# Altium PCB sana_rafia.PcbDoc
Units mm, origin at the board's own origin, x right, y up, seen from the top; angles counter-clockwise.
Board outline 103.5 x 63.75 mm, 2 copper layers (Top Layer, Bottom Layer); 28 components, 23 nets, 114 pads, 21 vias.
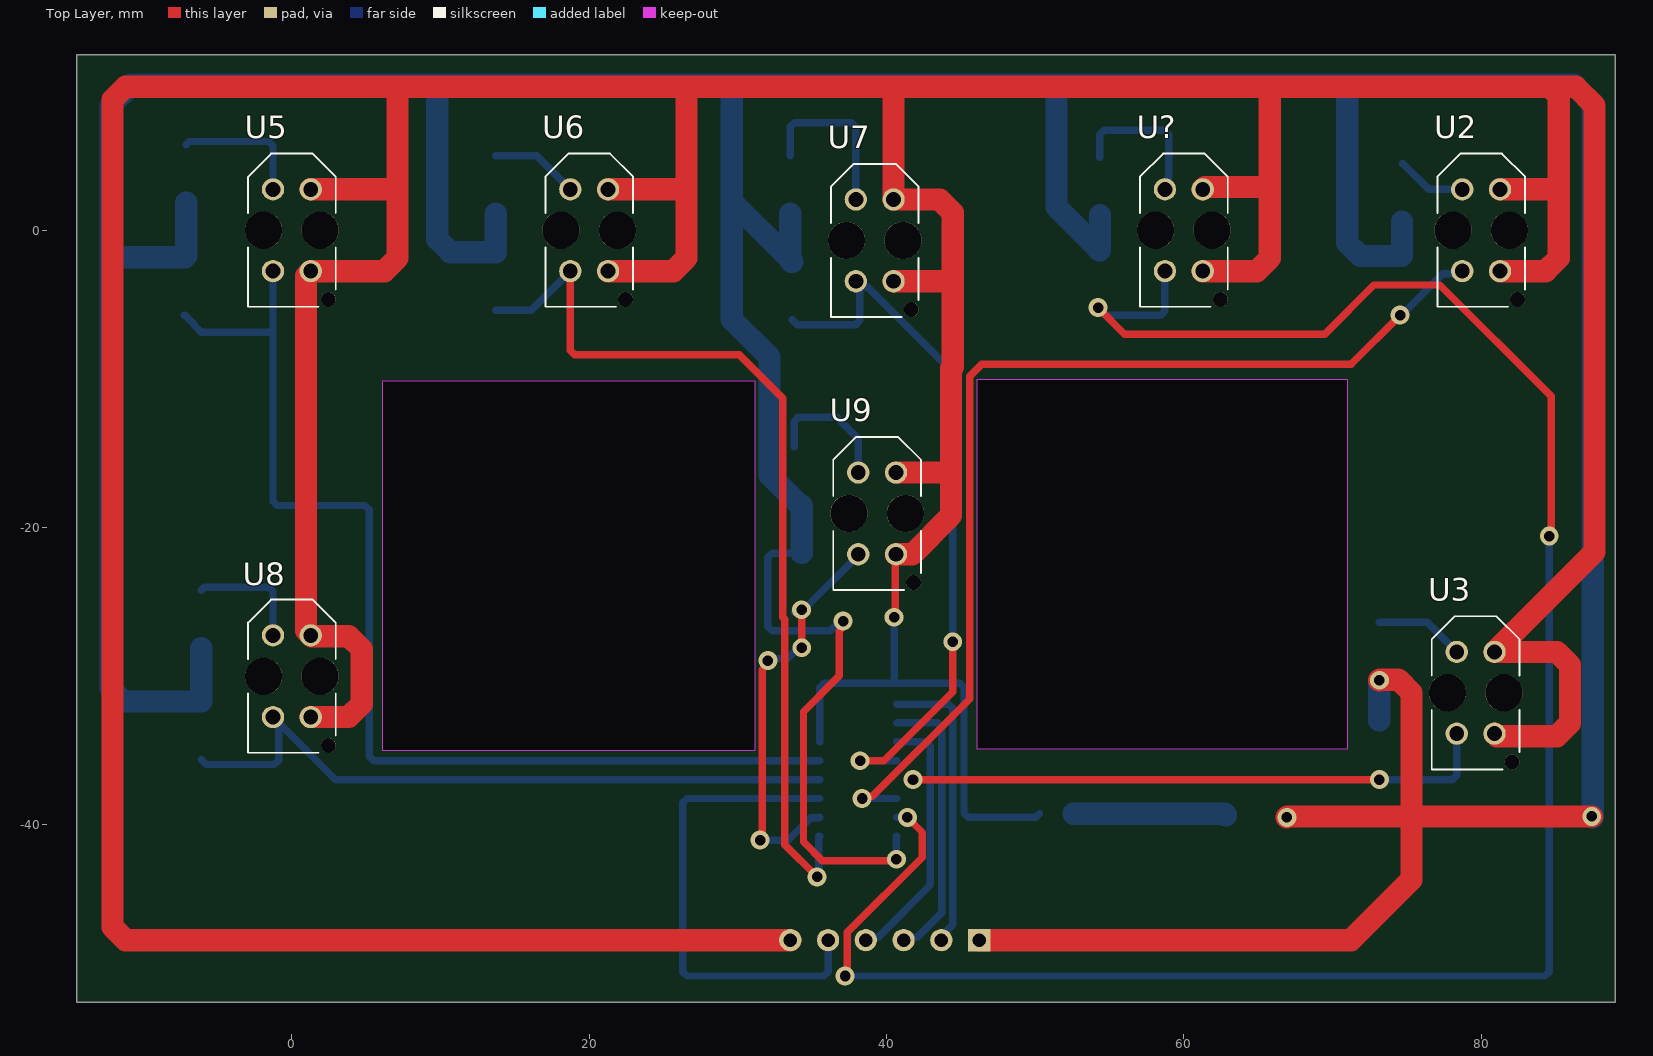
[diagram p0: Top Layer view]
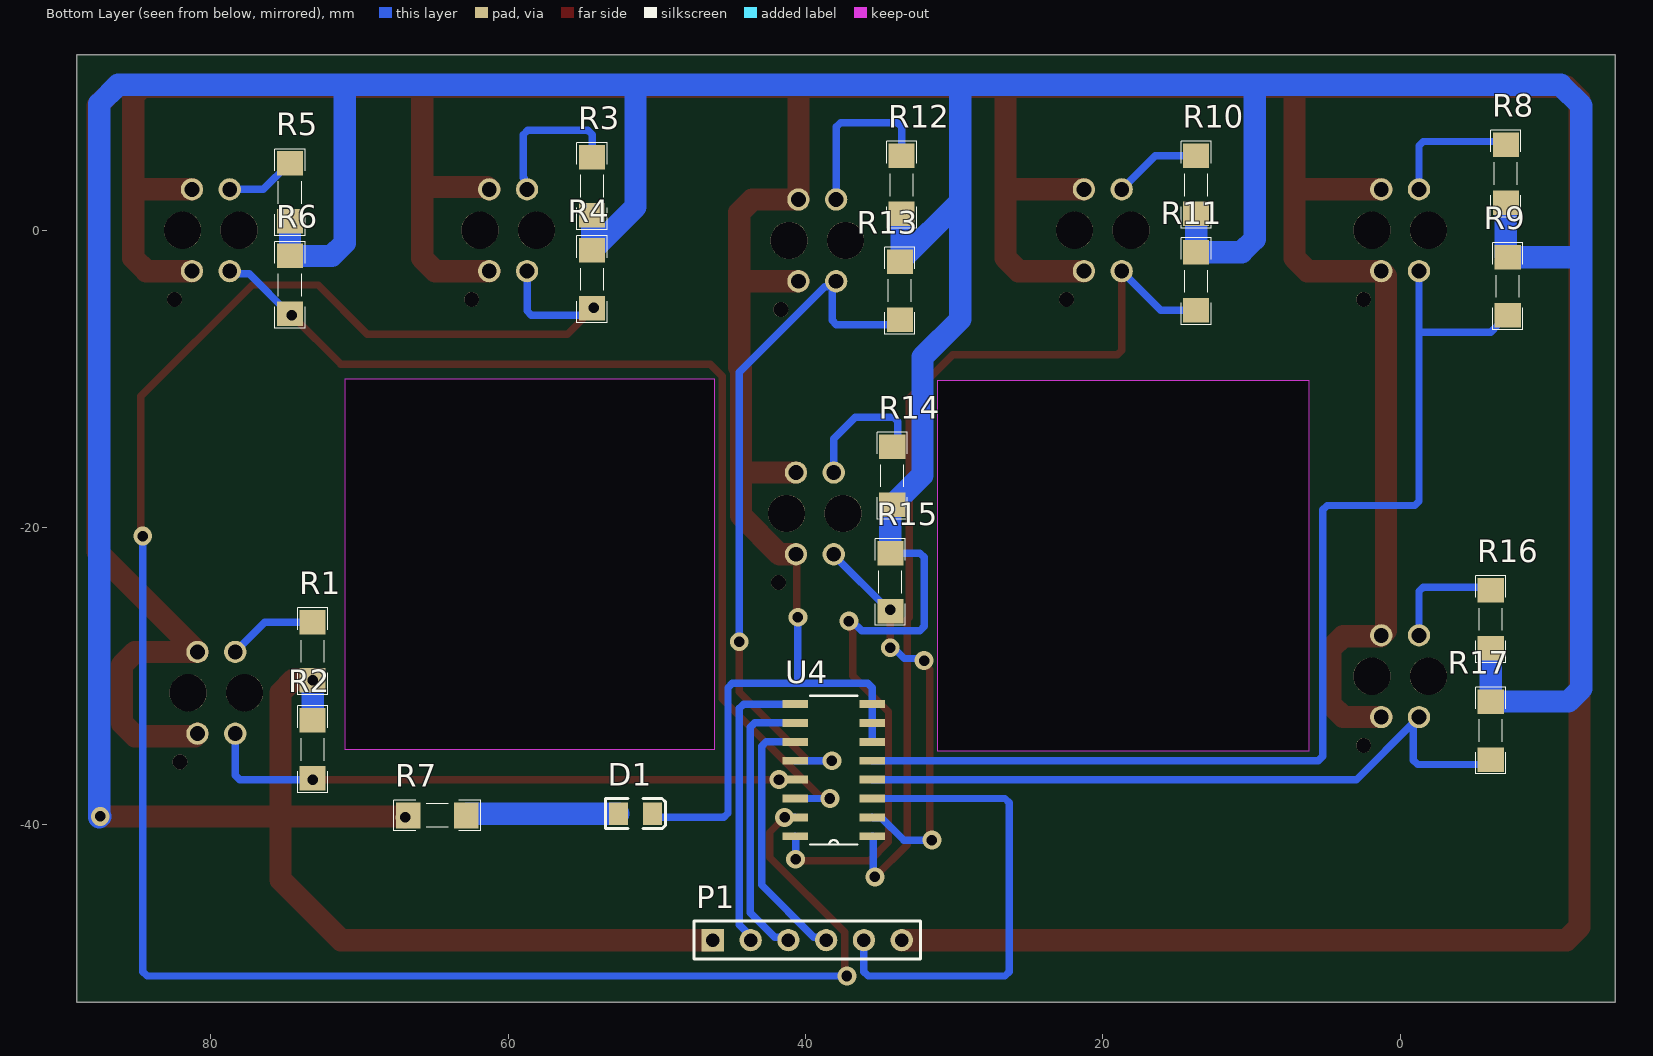
[diagram p1: Bottom Layer view, seen from below]
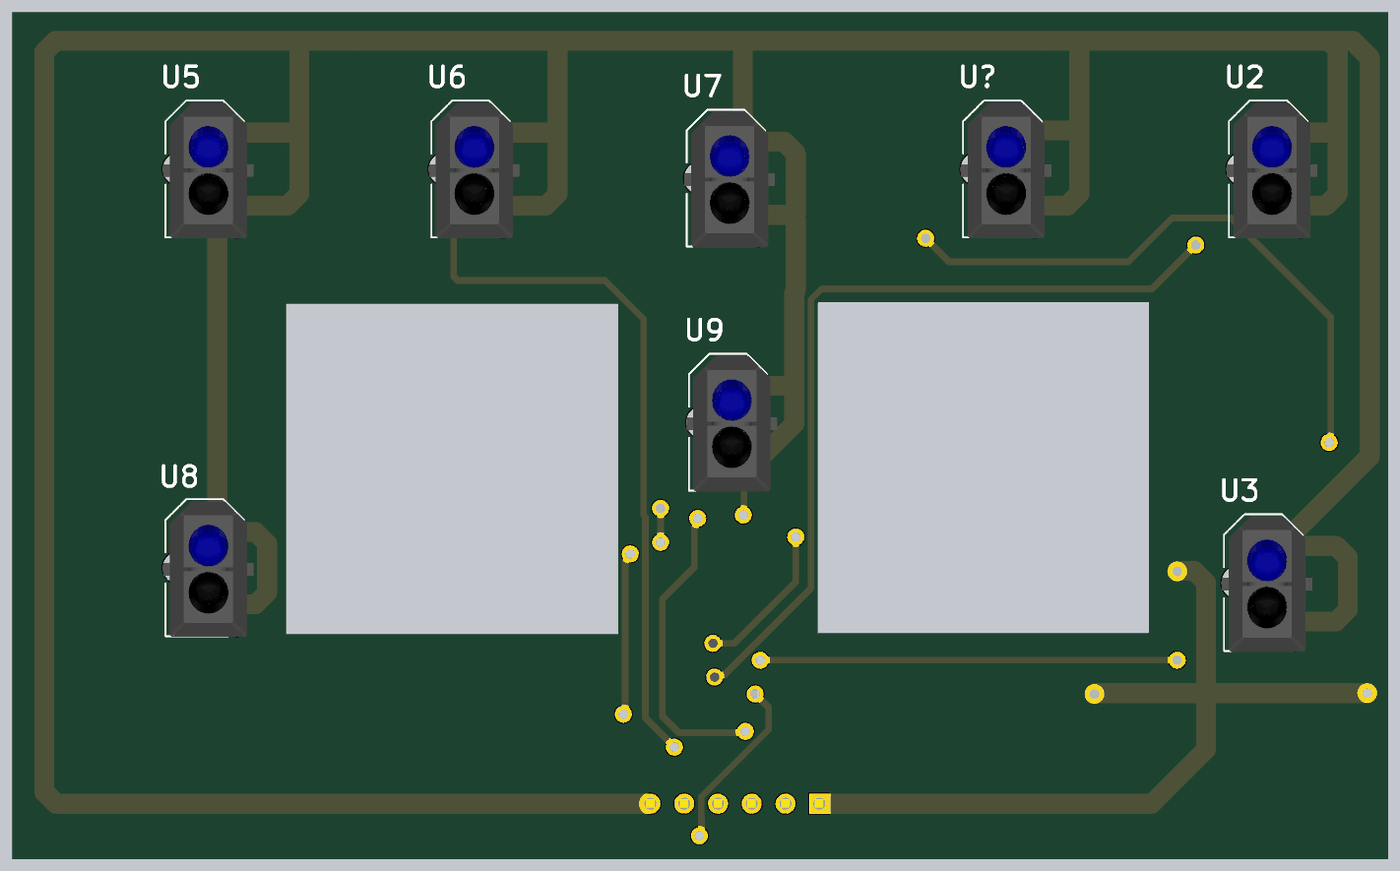
[diagram p2: 3D render of the assembled board from above, using the file's embedded part models]
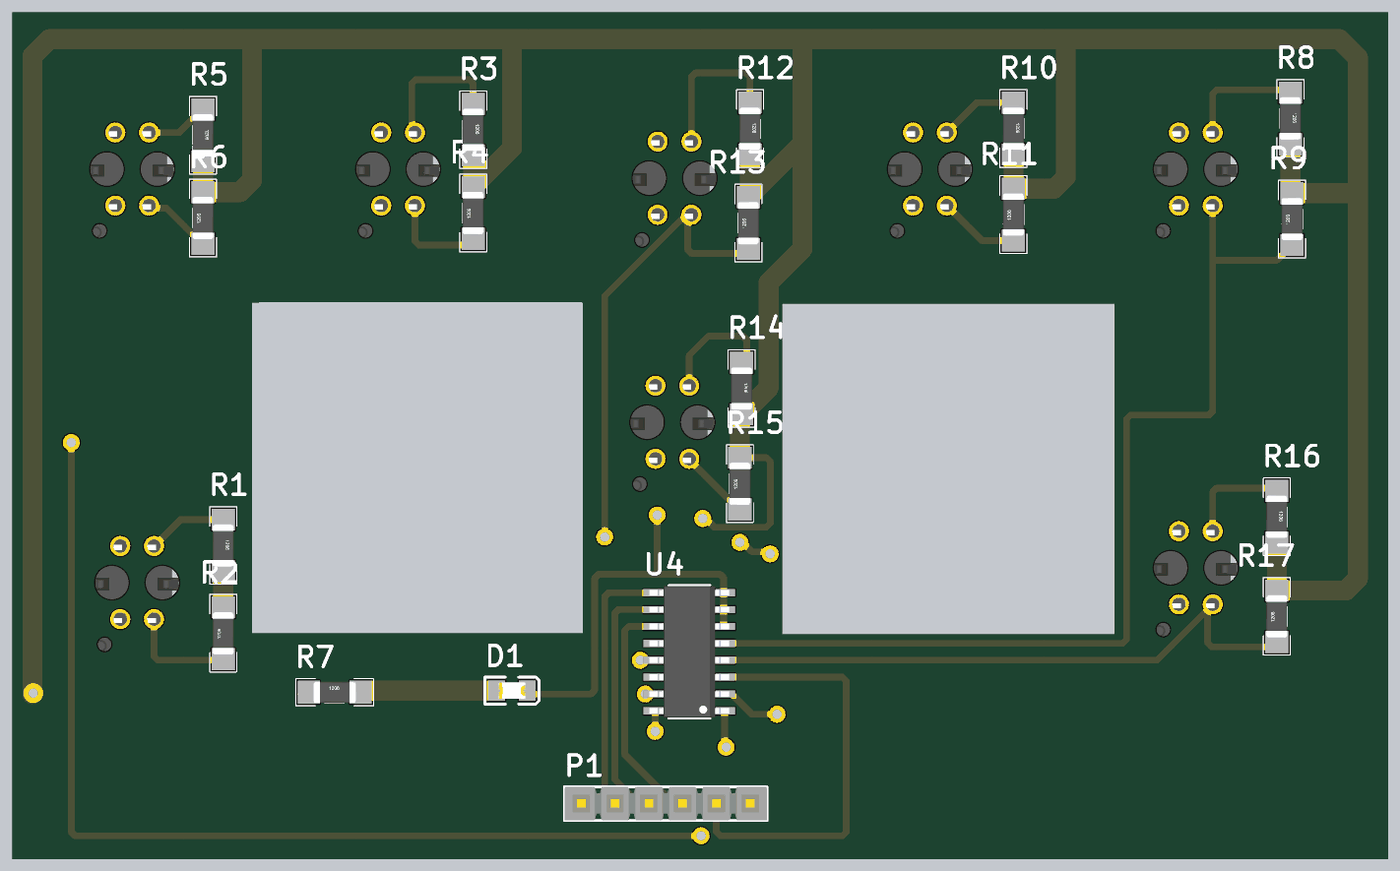
[diagram p3: 3D render of the assembled board from below, using the file's embedded part models]

## Layer stack, top to bottom
Top Solder: solder mask 0.0102, Solder Resist, Dk 3.5
Top Layer: signal copper 0.0356
Dielectric 1: dielectric 0.32, FR-4, Dk 4.8
Bottom Layer: signal copper 0.0356
Bottom Solder: solder mask 0.0102, Solder Resist, Dk 3.5

## Board outline
-14.478,-51.943 -14.478,11.811 89.027,11.811 89.027,-51.943
cut-out: 46.101,-10.033 70.993,-10.033 70.993,-34.925 46.101,-34.925
cut-out: 31.127,-10.127 31.127,-35 6.127,-35 6.127,-10.127

## Design rules (kind name [scope] priority, off if disabled: settings)
Clearance [All] p1: gap=0.254 ignorepadtopadclearanceinfootprint=FALSE except(0: Arc-Hole Track-Hole SMDPad-Hole THPad-Hole Via-Hole Fill-Hole Poly-Hole Region-Hole Text-Hole)
PolygonConnect [All] p1: connectstyle=Relief reliefconductorwidth=0.254 reliefentries=4 polygonreliefangle="90 Angle" airgapwidth=0.254
RoutingVias [All] p1: holewidth=0.711 width=1.27 viastyle="Through Hole" minholewidth=0.711 minwidth=1.27 maxholewidth=0.711 maxwidth=1.27
SolderMaskExpansion [All] p1: expansion=0.102 istentingtop=FALSE
Width [All] p1: maxlimit=1.5 minlimit=0.5 preferedwidth=1 minimp=50.000000 maximp=50.000000 favimp=50.000000
30 further rules are at their usual default settings.

## Components (designator, comment, footprint, x,y, rotation, side; value= is the part's Value field where it differs from the comment)
D1 "LED-SMD(0805)" "0805 LED" 51.435,-39.243 r180 bottom
P1 "Header 6" HDR1X6 46.228,-47.752 r180 bottom
R1 "1K" RESC4817X04N 73.152,-28.321 r270 bottom
R2 "1K" RESC4817X04N 73.152,-34.925 r90 bottom
R3 "1K" RESC4817X04N 54.356,2.966 r270 bottom
R4 "1K" RESC4817X04N 54.356,-3.302 r90 bottom
R5 "1K" RESC4817X04N 74.676,2.54 r270 bottom
R6 "1K" RESC4817X04N 74.676,-3.683 r90 bottom
R7 "1K" RESC4817X04N 64.77,-39.37 r180 bottom
R8 "1K" RESC4817X04N -7.112,3.81 r270 bottom
R9 "1K" RESC4817X04N -7.239,-3.765 r90 bottom
R10 "1K" RESC4817X04N 13.716,3.048 r270 bottom
R11 "1K" RESC4817X04N 13.716,-3.429 r90 bottom
R12 "1K" RESC4817X04N 33.528,3.048 r270 bottom
R13 "1K" RESC4817X04N 33.655,-4.064 r90 bottom
R14 "1K" RESC4817X04N 34.163,-16.51 r270 bottom
R15 "1K" RESC4817X04N 34.29,-23.667 r90 bottom
R16 "1K" RESC4817X04N -6.096,-26.162 r270 bottom
R17 "1K" RESC4817X04N -6.096,-33.655 r90 bottom
U2 "TCRT5000" OPTO_TCRT5000 80,0 r90 top
U3 "TCRT5000" OPTO_TCRT5000 79.629,-31.115 r90 top
U4 "74HC4051D" SOIC127P600X175-16N 38.1,-36.322 r0 bottom
U5 "TCRT5000" OPTO_TCRT5000 0,0 r90 top
U6 "TCRT5000" OPTO_TCRT5000 20,0 r90 top
U7 "TCRT5000" OPTO_TCRT5000 39.206,-0.684 r90 top
U8 "TCRT5000" OPTO_TCRT5000 0,-30 r90 top
U9 "TCRT5000" OPTO_TCRT5000 39.37,-19.05 r90 top
U? "TCRT5000" OPTO_TCRT5000 60,0 r90 top

## Footprints (in the part's own frame and the unit in brackets; to place one, negate y for a bottom-side part, rotate by r counter-clockwise, add the part's x,y. Pads: shape width x height; smd on the part's side, far side on the other; paste and mask are expansions set on the pad)
"0805 LED" [mil]
  rect 50x60 smd: 1(-45,0) 2(45,0)
  silkscreen extent -80,-40 80,40, body extent -39,-25 39,25, height 32
HDR1X6 [mm] "Connector; Header; 6 Position"
  rect 1.5x1.5 hole 0.9: 1(0,0)
  round 1.5 hole 0.9: 2(2.54,0) 3(5.08,0) 4(7.62,0) 5(10.16,0) 6(12.7,0)
  silkscreen extent -1.27,-1.27 13.97,1.27, body extent -1.26,-1.25 13.98,1.29, height 8.38
OPTO_TCRT5000 [mm]
  round 1.5 hole 1: A(2.75,1.27) CATH(2.75,-1.27) COLL(-2.75,1.27) E(-2.75,-1.27)
  round 1 hole 1 unplated: ""(-4.65,-2.45)
  round 2.5 hole 2.5 unplated: ""(0,1.9) ""(0,-1.9)
  silkscreen extent -5.15,-2.95 5.15,2.95, body extent -5.21,-3.68 4.99,3.12, height 10.63
RESC4817X04N [mm] "Chip Resistor, 2-Leads, Body 4/80x1/70mm, IPC Medium Density-Design:Abbas Basereh"
  rect 1.65x1.75 smd: 1(-1.95,0) 2(1.95,0)
  silkscreen extent -2.92,-1.02 2.92,1.02, body extent -1.6,-0.8 1.6,0.8, height 1
SOIC127P600X175-16N [mil]
  rect 67x21 smd: 1(-102,175) 2(-102,125) 3(-102,75) 4(-102,25) 5(-102,-25) 6(-102,-75) 7(-102,-125) 8(-102,-175) 9(102,-175) 10(102,-125) 11(102,-75) 12(102,-25) 13(102,25) 14(102,75) 15(102,125) 16(102,175)
  silkscreen extent -62,-197 62,197, body extent -118,-195 118,195, height 69

## Part data
P1: "Header, 6-Pin", LatestRevisionDate=17-Jul-2002, LatestRevisionNote="Re-released for DXP Platform.", Publisher="Altium Limited"
R1 R2 R3 R4 R5 R6 R7 R8 R9 R10 R11 R12 R13 R14 R15 R16 R17: library part "RES 1206 0.25W", "RES 1206", Data=16-12-2016, Desc.="RES SMD 1206", Designer="Abbas Basereh"
U2 U3 U5 U6 U7 U8 U9 U?: "950 nm 60 mA Through Hole Reflective Optical Sensor with Transistor Output", Package=None, Availability=Unavailable, MP=TCRT5000, Price=None
U4: "1 Circuit IC Switch 8:1 130Ohm 16-SOIC", Package="SOIC-16 Toshiba", Availability="In Stock", Check_prices=https://www.snapeda.com/parts/74HC4051D/Toshiba/view-part/?ref=eda, MF=Toshiba, MP=74HC4051D, Price=None, Purchase-URL=https://pricing.snapeda.com/search/part/74HC4051D/?ref=eda, SnapEDA_Link=https://www.snapeda.com/parts/74HC4051D/Toshiba/view-part/?ref=snap

## Via types
v1: diameter 1.27, hole 0.711, Top Layer to Bottom Layer, 21 vias

## Nets (pads, with @x,y where several pads share a name; then routed paths per layer and width w, separated by ;. In a path a pad name is that pad's centre, name@x,y a point inside that pad or via, vN(x,y) a via of type N, cw(c..) or ccw(c..) an arc to the next point about the centre after c; other vN are vias at no path point)
+5: P1.1 R1.2 R2.2 R3.2 R4.2 R5.2 R6.2 R7.1 R8.2 R9.2 R10.2 R11.2 R12.2 R13.2 R14.2 R15.2 R16.2 R17.2 U4.16 | length 404.3
  Top Layer w0.5: v1(37.084,-26.289) 36.937,-26.436 36.937,-26.86 36.83,-26.967 36.83,-29.972 34.417,-32.385 34.417,-41.148 35.687,-42.418 40.558,-42.418 v1(40.662,-42.313)
  Top Layer w1.5: P1.1 71.247,-47.752 75.311,-43.688 75.311,-39.433 ; v1(66.929,-39.497) 66.992,-39.433 75.311,-39.433 ; v1(73.152,-30.271) 73.19,-30.233 74.432,-30.233 75.311,-31.112 75.311,-39.433 ; v1(87.439,-39.433) 75.311,-39.433
  Bottom Layer w0.5: R15.2 32.297,-21.717 32.004,-22.01 32.004,-26.653 32.297,-26.946 36.219,-26.946 36.876,-26.289 v1(37.084,-26.289) ; v1(40.662,-42.313) 40.662,-40.784 40.679,-40.767 U4.16
  Bottom Layer w1.5: R8.2 -7.112,-1.738 -7.189,-1.815 R9.2 -12.102,-1.815 -12.192,-1.905 ; R16.2 R17.2 -11.313,-31.705 -12.192,-30.826 -12.192,-1.905 ; R10.2 R11.2 10.658,-1.479 9.779,-0.6 9.779,9.779 ; R12.2 R13.2@33.528,-1.987 ; R13.2 33.605,-2.114 33.53,-2.039 33.53,-1.989 R13.2@33.528,-1.987 ; R15.2 34.29,-18.537 34.213,-18.46 R14.2 34.113,-18.46 32.131,-16.478 32.131,-8.534 29.591,-5.994 29.591,1.95 ; R3.2 R4.2 54.306,-1.352 54.231,-1.277 54.231,-1.227 51.435,1.569 51.435,9.779 ; R2.2 v1(73.152,-30.271) ; R5.2 R6.2 71.872,-1.733 70.993,-0.854 70.993,9.652 71.12,9.779 ; v1(87.439,-39.433) 87.503,-39.497 87.503,8.509 86.233,9.779 71.12,9.779 ; -12.192,-1.905 -12.192,8.382 -10.795,9.779 9.779,9.779 ; 9.779,9.779 29.591,9.779 ; 29.591,1.95 R13.2@33.528,-1.987 ; 29.591,1.95 29.591,9.779 ; 29.591,9.779 51.435,9.779 ; 51.435,9.779 71.12,9.779
GND: D1.2 P1.6 U2.CATH U2.E U3.CATH U3.E U4.6 U4.7 U4.8 U5.CATH U5.E U6.CATH U6.E U7.CATH U7.E U8.CATH U8.E U9.CATH U9.E U?.CATH U?.E | length 460.7
  Top Layer w0.5: v1(40.513,-26.035) 40.576,-25.971 40.576,-21.863 U9.E
  Top Layer w1.5: U8.E 3.82,-32.75 4.699,-31.871 4.699,-28.184 3.82,-27.305 1.325,-27.305 U8.CATH 0.946,-26.926 0.946,-3.074 U5.E 6.233,-2.75 7.112,-1.871 7.112,2.667 ; U5.CATH 7.029,2.75 7.112,2.667 ; U6.E 25.664,-2.75 26.543,-1.871 26.543,2.921 ; U6.CATH 26.372,2.75 26.543,2.921 ; P1.6 -11.186,-47.752 -12.065,-46.873 -12.065,8.773 -11.186,9.652 7.112,9.652 ; U7.E 44.45,-3.434 44.45,1.187 43.571,2.066 U7.CATH 40.476,9.435 40.259,9.652 ; U9.E 41.736,-21.8 44.343,-19.193 44.343,-16.3 ; U9.CATH 44.343,-16.3 ; 44.45,-3.698 44.45,-9.198 44.343,-9.305 44.343,-16.3 ; U?.E 64.907,-2.75 65.786,-1.871 65.786,2.901 ; U?.CATH 61.421,2.901 65.786,2.901 ; U3.E 81.07,-34.036 85.1,-34.036 85.979,-33.157 85.979,-29.244 85.1,-28.365 U3.CATH 87.63,-21.634 87.63,8.382 86.36,9.652 84.582,9.652 ; U2.E 84.338,-2.75 85.217,-1.871 85.217,2.921 ; U2.CATH 85.046,2.75 85.217,2.921 ; 7.112,2.667 7.112,9.652 ; 7.112,9.652 21.336,9.652 26.67,9.652 ; 26.543,2.921 26.543,9.525 26.67,9.652 ; 26.67,9.652 40.259,9.652 ; 40.259,9.652 65.913,9.652 ; 65.786,2.901 65.786,9.525 65.913,9.652 ; 65.913,9.652 84.582,9.652 ; 84.582,9.652 85.217,9.017 85.217,2.921
  Bottom Layer w0.5: U4.6 U4.7 U4.8 35.509,-30.773 35.802,-30.48 40.513,-30.48 ; v1(40.513,-26.035) 40.513,-30.48 ; D1.2 50.038,-39.497 45.505,-39.497 45.212,-39.204 45.212,-30.773 44.919,-30.48 40.513,-30.48
NetD1_1: D1.1 R7.2 | length 10.3
  Bottom Layer w1.5: D1.1 62.743,-39.243 62.82,-39.32 R7.2
NetR1_1: R1.1 U3.A | length 6
  Bottom Layer w0.5: R1.1 76.365,-26.371 U3.A
NetR3_1: R3.1 U?.A | length 10.2
  Bottom Layer w0.5: R3.1 54.356,6.438 54.649,6.731 58.678,6.731 58.971,6.438 58.971,3.543 58.921,3.494 58.921,2.941 U?.A
NetR5_1: R5.1 U2.A | length 4.8
  Bottom Layer w0.5: R5.1 74.726,4.49 76.466,2.75 U2.A
NetR8_1: R8.1 U5.A | length 9
  Bottom Layer w0.5: R8.1 -6.903,5.969 -1.563,5.969 -1.27,5.676 U5.A
NetR10_1: R10.1 U6.A | length 5.9
  Bottom Layer w0.5: R10.1 16.482,4.998 U6.A
NetR12_1: R12.1 U7.A | length 11.5
  Bottom Layer w0.5: R12.1 33.528,6.946 33.821,7.239 37.643,7.239 37.936,6.946 U7.A
NetR14_1: R14.1 U9.A | length 9
  Bottom Layer w0.5: R14.1@33.782,-14.56 33.782,-12.866 34.075,-12.573 36.653,-12.573 38.1,-14.02 U9.A
NetR16_1: R16.1 U8.A | length 8
  Bottom Layer w0.5: R16.1 -5.887,-24.003 -1.563,-24.003 -1.27,-24.296 U8.A
OUT: P1.5 U4.3 | length 32.8
  Bottom Layer w0.5: U4.3 26.582,-38.227 26.289,-38.52 26.289,-49.872 26.582,-50.165 35.775,-50.165 36.068,-49.872 P1.5
S0: P1.4 U4.11 | length 17.6
  Bottom Layer w0.5: P1.4 38.799,-47.561 39.434,-47.561 42.95,-44.045 42.95,-34.71 42.657,-34.417 U4.11
S1: P1.3 U4.10 | length 18.9
  Bottom Layer w0.5: U4.10 40.708,-33.13 43.411,-33.13 43.704,-33.423 43.704,-45.913 42.057,-47.561 41.339,-47.561 P1.3
S2: P1.2 U4.9 | length 19.8
  Bottom Layer w0.5: U4.9 44.165,-31.877 44.458,-32.17 44.458,-46.711 43.688,-47.481 P1.2
Y0: R2.1 U3.COLL U4.13 | length 39.5
  Top Layer w0.5: v1(41.783,-36.957) v1(73.152,-36.957)
  Bottom Layer w0.5: v1(73.152,-36.957) 78.066,-36.957 78.359,-36.664 U3.COLL
Y1: R6.1 U2.COLL U4.14 | length 70
  Top Layer w0.5: v1@38.358,-38.227 38.505,-38.08 39.05,-38.08 45.597,-31.532 45.597,-9.824 46.404,-9.017 71.247,-9.017 v1(74.549,-5.715)
  Bottom Layer w0.5: v1(38.354,-38.227) U4.14 ; R6.1 74.726,-5.633 77.418,-2.941 78.539,-2.941 U2.COLL
Y2: R4.1 U4.15 U?.COLL | length 143.6
  Top Layer w0.5: v1(37.211,-50.165) 37.358,-50.018 37.358,-48.788 37.354,-48.784 37.354,-47.233 42.418,-42.169 42.418,-40.513 v1(41.402,-39.497) ; v1(54.229,-5.207) 56.007,-6.985 69.469,-6.985 72.771,-3.683 77.216,-3.683 84.709,-11.176 v1@84.709,-20.828
  Bottom Layer w0.5: v1(37.211,-50.165) 84.289,-50.165 84.582,-49.872 v1(84.582,-20.574) ; U4.15 v1(41.402,-39.497) ; v1(54.229,-5.207) 54.737,-5.715 58.437,-5.715 58.73,-5.422 U?.COLL
Y3: R13.1 U4.12 U7.COLL | length 48.3
  Top Layer w0.5: v1(38.227,-35.687) 39.831,-35.687 44.458,-31.06 v1(44.458,-27.686)
  Bottom Layer w0.5: R13.1 33.991,-6.35 37.917,-6.35 38.21,-6.057 38.21,-3.979 38.127,-3.896 38.127,-3.791 38.21,-3.708 U7.COLL ; v1(38.227,-35.687) U4.12 ; U7.COLL@38.345,-3.573 38.567,-3.795 38.697,-3.795 44.458,-9.556 v1(44.458,-27.686)
Y4: R11.1 U4.1 U6.COLL | length 63.1
  Top Layer w0.5: U6.COLL 18.73,-8.089 19.023,-8.382 30.095,-8.382 33.024,-11.311 33.024,-26.041 33.155,-26.172 33.155,-41.327 v1(35.327,-43.499)
  Bottom Layer w0.5: R11.1 16.101,-5.379 U6.COLL ; v1(35.327,-43.499) 35.433,-43.392 35.433,-40.784 35.45,-40.767 U4.1
Y5: R9.1 U4.5 U5.COLL | length 75.7
  Bottom Layer w0.5: R9.1 -7.189,-5.715 -6.614,-6.29 -6.614,-6.34 -6.096,-6.858 -1.27,-6.858 ; U5.COLL -1.27,-6.858 ; U4.5 5.5,-35.687 5.207,-35.394 5.207,-18.812 4.914,-18.519 -0.977,-18.519 -1.27,-18.226 -1.27,-6.858
Y6: R15.1 U4.2 U9.COLL | length 28.1
  Top Layer w0.5: v1(31.496,-41.021) 31.631,-40.886 31.631,-29.549 32.016,-29.164 v1(32.016,-28.956) ; v1(34.29,-25.527) 34.292,-25.529 34.292,-28.083 v1(34.294,-28.085)
  Bottom Layer w0.5: v1(31.496,-41.021) 33.401,-41.021 34.908,-39.514 35.492,-39.514 U4.2 ; v1(32.016,-28.956) 32.163,-28.809 33.362,-28.809 34.086,-28.085 v1(34.294,-28.085) ; R15.1@33.782,-25.699 33.832,-25.699 34.004,-25.527 v1(34.29,-25.527) ; R15.1 34.34,-25.617 38.1,-21.857 U9.COLL
Y7: R17.1 U4.4 U8.COLL | length 46.5
  Bottom Layer w0.5: R17.1 -5.76,-35.941 -1.182,-35.941 -0.889,-35.648 U8.COLL@-0.889,-33.131 ; U8.COLL U8.COLL@-0.889,-33.131 ; U4.4 2.937,-36.957 U8.COLL@-0.889,-33.131
pads on no net: U2. U3. U5. U6. U7. U8. U9. U?.

## Silkscreen, mask and mechanical layers (free items; w line width, h text height)
Mechanical 1:
  lines w0.254: -14.478,-51.943 -14.478,11.811 89.027,11.811 89.027,-51.943 -14.478,-51.943 ; 6.127,-35 31.127,-35 31.127,-10.127 6.127,-10.127 6.127,-35 ; 46,-35 46,-10 71,-10 71,-35 46,-35